# EAGLE board BME280_Sensor-Board_EAGLE (EAGLE 7.5.0)
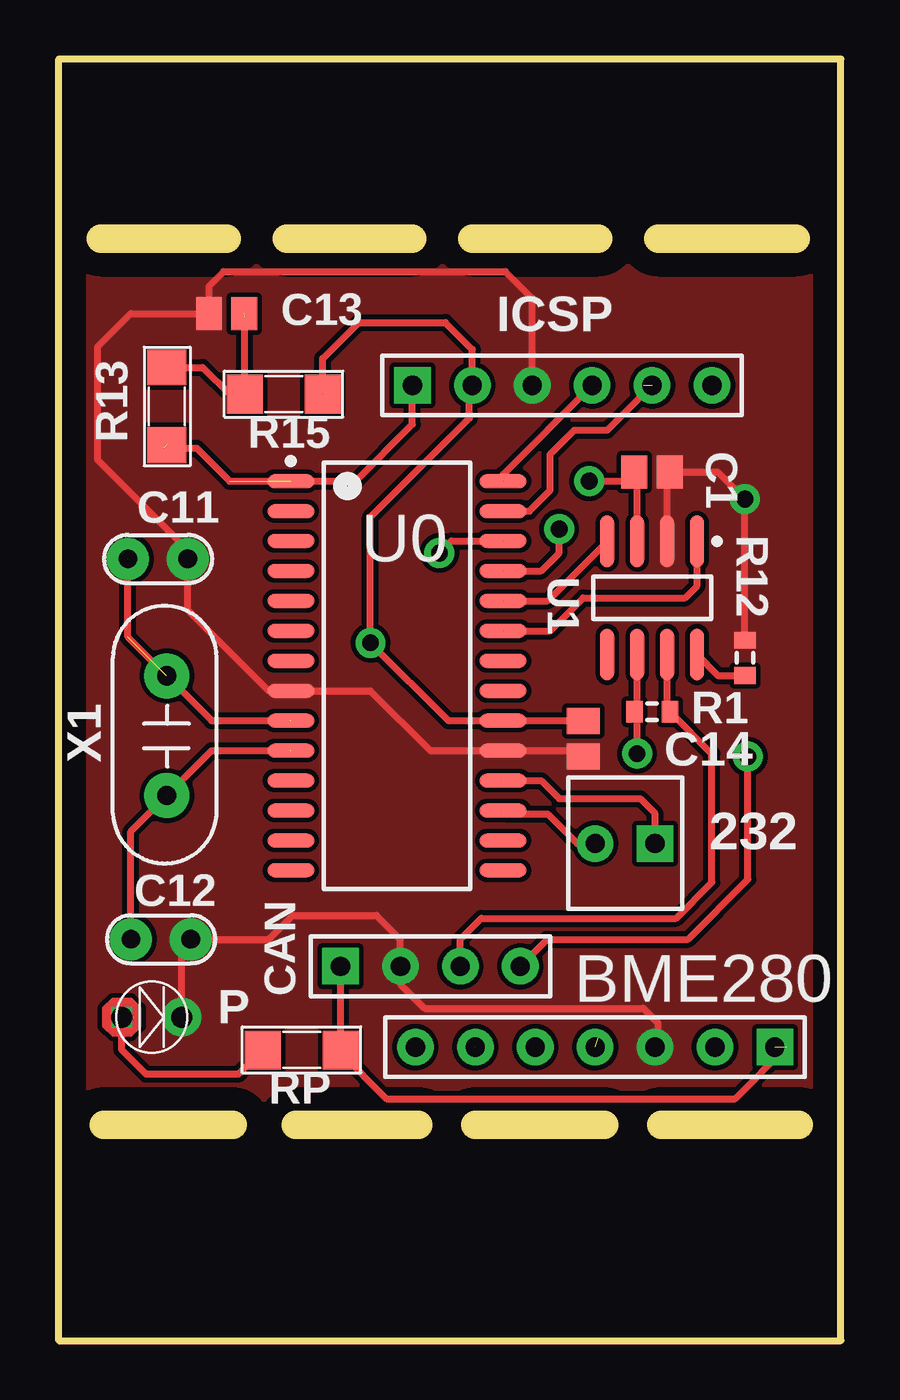
[diagram p0: board, top side]
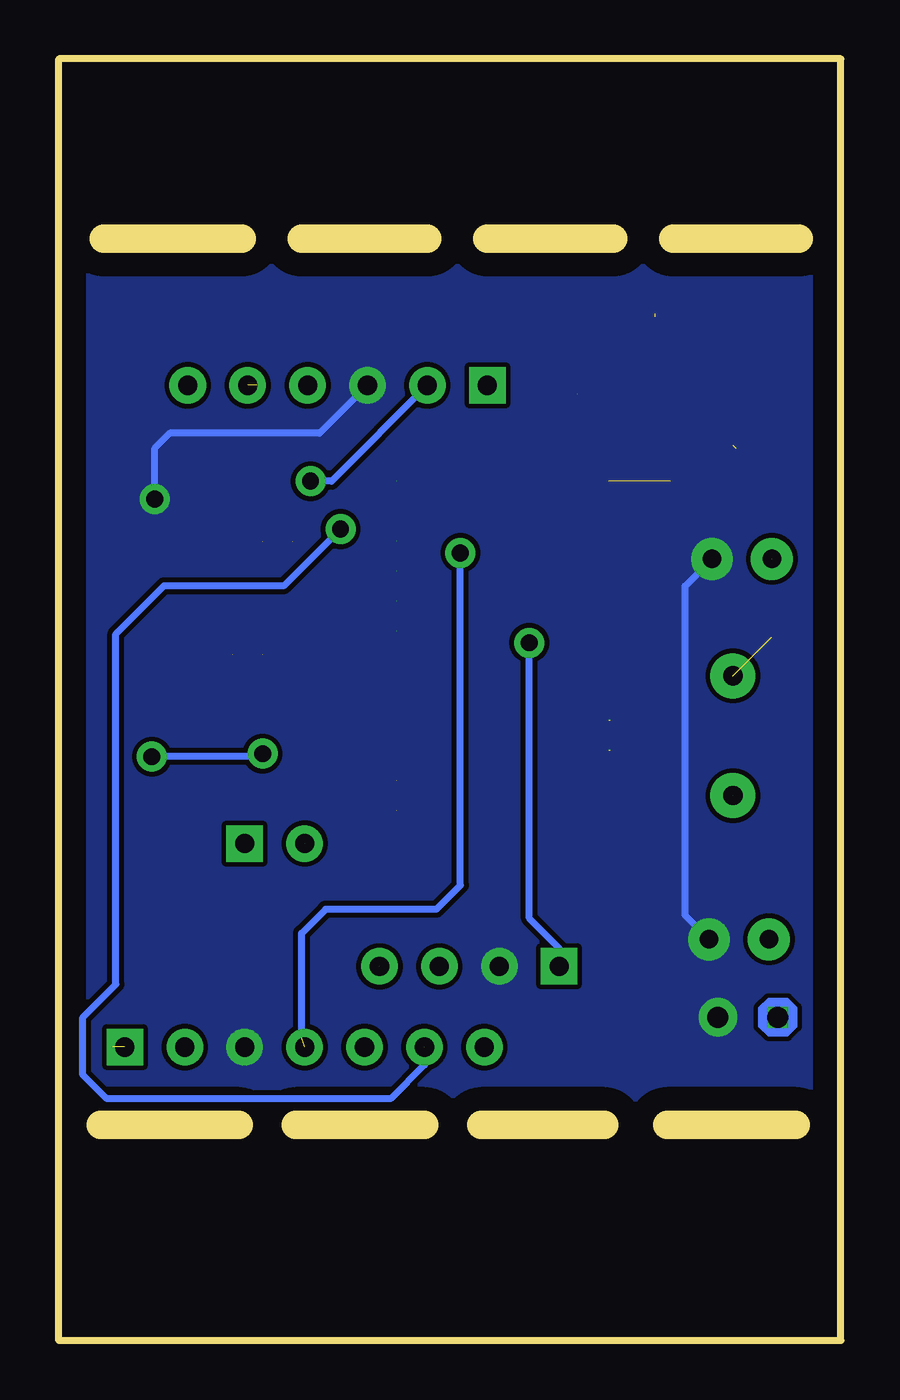
[diagram p1: board, bottom side, seen from below]

Size 33.15 x 54.36 mm. Coordinates in mm from the lower left corner, seen from the top.
Outline: 1.78,46.74 7.11,46.74
Outline: 9.65,46.74 14.99,46.74
Outline: 17.53,46.74 22.86,46.74
Outline: 25.53,9.14 31.37,9.14
Outline: 17.65,9.14 23.11,9.14
Outline: 10.03,9.14 15.24,9.14
Outline: 1.91,9.14 7.37,9.14
Outline: 25.4,46.74 31.24,46.74
Outline: 0,0 0,54.36 33.15,54.36 33.15,0 0,0
Copper layers (1*16): Top 0.035mm / dielectric 1.5mm / Bottom 0.035mm
Design rules "BME280_Sensor-Board_P_CAD": minimum track width 10mil, minimum drill 24mil, track to track 8mil, track to pad 8mil, pad to pad 8mil, via to via 8mil, smd to smd 8mil, copper to edge 40mil, drill to drill 8mil, minimum pad ring 0mil, minimum via ring 0mil, stop-mask expansion 4mil, vias tented up to drill 0mil, thermal gap 10mil

## Footprints (pad centres in the part's own frame; a part is rotated, then mirrored left to right if it is on the bottom)
HDR2_1PRIMARY = drill 0.813 pad 1.549 square: 1 0,0 | drill 0.813 pad 1.549: 2 2.54,0
HDR1X7_1PRIMARY = drill 0.813 pad 1.549 square: 1 0,0 | drill 0.813 pad 1.549: 2 2.54,0; 3 5.08,0; 4 7.62,0; 5 10.16,0; 6 12.7,0; 7 15.24,0
C0805_1PRIMARY = smd 1.1 x 1.4: 1 -0.75,0; 2 0.75,0
CN1_1PRIMARY = drill 0.787 pad 1.778: 1 -1.27,0; 2 1.27,0
HDR1X4_1PRIMARY = drill 0.813 pad 1.549 square: 1 0,0 | drill 0.813 pad 1.549: 2 2.54,0; 3 5.08,0; 4 7.62,0
HDR1X6_1PRIMARY = drill 0.813 pad 1.549 square: 1 0,0 | drill 0.813 pad 1.549: 2 2.54,0; 3 5.08,0; 4 7.62,0; 5 10.16,0; 6 12.7,0
LED-3MM-YELLOW_1PRIMARY = drill 0.889 pad 0.838 square: 1 0,0 | drill 0.889 pad 1.651: 2 2.54,0
J1-0603_1PRIMARY = smd 0.7 x 0.9: 1 -0.75,0; 2 0.75,0
SM-RES-1206_1PRIMARY = smd 1.524 x 1.651: 1 0,0; 2 3.302,0
SOIC-SO28_L_1PRIMARY = smd 2 x 0.6: 1 -4.5,8.255; 2 -4.5,6.985; 3 -4.5,5.715; 4 -4.5,4.445; 5 -4.5,3.175; 6 -4.5,1.905; 7 -4.5,0.635; 8 -4.5,-0.635; 9 -4.5,-1.905; 10 -4.5,-3.175; 11 -4.5,-4.445; 12 -4.5,-5.715; 13 -4.5,-6.985; 14 -4.5,-8.255; 15 4.5,-8.255; 16 4.5,-6.985; 17 4.5,-5.715; 18 4.5,-4.445; 19 4.5,-3.175; 20 4.5,-1.905; 21 4.5,-0.635; 22 4.5,0.635; 23 4.5,1.905; 24 4.5,3.175; 25 4.5,4.445; 26 4.5,5.715; 27 4.5,6.985; 28 4.5,8.255
SOIC-SN8_N_1PRIMARY = smd 2.2 x 0.6: 1 -2.4,1.905; 2 -2.4,0.635; 3 -2.4,-0.635; 4 -2.4,-1.905; 5 2.4,-1.905; 6 2.4,-0.635; 7 2.4,0.635; 8 2.4,1.905
XT2_1PRIMARY = drill 0.813 pad 1.905: 1 -2.54,0; 2 2.54,0

## Placement (x,y rotation side)
232  Header2  [HDR2_1PRIMARY]  25.27,21.08 180 top
BME280  Header_7  [HDR1X7_1PRIMARY]  30.35,12.45 180 top
C1  Cap_Pol3  [C0805_1PRIMARY]  25.15,36.83 0 top
C11  22pF  [CN1_1PRIMARY]  4.19,33.15 0 top
C12  22pF  [CN1_1PRIMARY]  4.32,17.02 0 top
C13  Cap_Pol3  [C0805_1PRIMARY]  7.11,43.56 180 top
C14  Cap_Pol3  [C0805_1PRIMARY]  22.22,25.53 270 top
CAN  Header_4  [HDR1X4_1PRIMARY]  11.94,15.88 0 top
ICSP  Header_6  [HDR1X6_1PRIMARY]  14.99,40.51 0 top
P  LED  [LED-3MM-YELLOW_1PRIMARY]  2.67,13.72 0 top
R1  Res3  [J1-0603_1PRIMARY]  25.15,26.67 0 top
R12  Res3  [J1-0603_1PRIMARY]  29.08,28.96 90 top
R13  470  [SM-RES-1206_1PRIMARY]  4.57,41.28 270 top
R15  10k  [SM-RES-1206_1PRIMARY]  7.87,40.13 0 top
RP  10k  [SM-RES-1206_1PRIMARY]  8.64,12.32 0 top
U0  PIC18F2480T-I/SO  [SOIC-SO28_L_1PRIMARY]  14.33,28.19 0 top
U1  MCP2551-E/SN  [SOIC-SN8_N_1PRIMARY]  25.15,31.5 270 top
X1  12Mhz  [XT2_1PRIMARY]  4.57,25.65 90 top

## Library data of the parts
232 BME280 C1 C11-C14 CAN ICSP P R1 R12 R13 R15 RP U0 U1 X1 = BME280_Sensor-Board_P_CAD

## Nets
GND1: BME280.3 C1.2 C11.2 C12.2 C13.2 C14.2 CAN.2 ICSP.3 P.2 R12.2 U0.8 U0.19 U1.2
NET232_1: 232.1 U0.18
NET232_2: 232.2 U0.17
NETBME280_4: BME280.4 U0.26
NETBME280_6: BME280.6 U0.25
NETC11_1: C11.1 U0.9 X1.2
NETC12_1: C12.1 U0.10 X1.1
NETC13_1: C13.1 R13.1 R15.1
NETCAN_3: CAN.3 R1.2 U1.7
NETCAN_4: CAN.4 R1.1 U1.6
NETICSP_1: ICSP.1 R13.2 U0.1
NETICSP_4: ICSP.4 U0.28
NETICSP_5: ICSP.5 U0.27
NETP_1: P.1 RP.1
NETR12_1: R12.1 U1.8
NETU0_23: U0.23 U1.1
NETU0_24: U0.24 U1.4
VCC1: BME280.1 C1.1 C14.1 CAN.1 ICSP.2 R15.2 RP.2 U0.20 U1.3

## Tracks (layer width: path | path; a pad name or v marks a point on that pad's centre or on a via)
GND1  (via drill 0.71 pad 1.27)
  Top 0.305: 5.59,14.1 P.2 5.21,16.64 C12.2 8.89,17.02 9.91,18.03 13.46,18.03 14.48,17.02 14.48,15.11 15.49,14.1 24.77,14.1 25.4,13.46 25.4,12.83 25.78,12.45 | 9.78,27.56 8.89,27.56 5.46,30.99 5.46,33.53 1.65,37.34 1.65,42.16 3.05,43.56 C13.2 6.36,44.72 6.99,45.34 18.92,45.34 20.07,44.2 ICSP.3 | U1.2 25.78,36.72 C1.2 27.94,36.83 v29.08,35.69 R12.2 | U0.8 13.21,27.56 15.75,25.02 21.98,25.02 C14.2
  Bottom 0.305: C11.2 6.6,32 6.6,18.03 C12.2 | ICSP.3 22.1,38.48 28.45,38.48 29.08,37.85 v29.08,35.69
  pour Top (no thermals): 0,54.36 33.15,54.36 33.15,0.25 32.89,0 0,0
  pour Bottom (no thermals): 0,54.36 33.15,54.36 33.15,0 0,0
NET232_1  (1 unrouted)
  Top 0.305: U0.18 20.45,23.75 21.21,22.99 24.64,22.99 25.27,22.35 232.1
NET232_2  (2 unrouted)
  Top 0.305: U0.17 18.98,22.33 20.73,22.33 21.97,21.08 232.2
NETBME280_4  (via drill 0.71 pad 1.27)  (2 unrouted)
  Top 0.305: v16.13,33.4 16.64,33.91 U0.26
  Bottom 0.305: v16.13,33.4 16.13,19.3 17.15,18.29 21.84,18.29 22.86,17.27 22.86,12.83 23.24,12.45
NETBME280_6  (via drill 0.71 pad 1.27)  (2 unrouted)
  Top 0.305: v21.21,34.42 21.21,33.4 20.45,32.64 U0.25
  Bottom 0.305: v21.21,34.42 23.62,32 28.7,32 30.73,29.97 30.73,15.11 32.13,13.72 32.13,11.27 31.12,10.25 19.09,10.25 17.65,11.68 BME280.6
NETC11_1  (3 unrouted)
  Top 0.305: 9.78,26.29 6.48,26.29 2.92,29.85 C11.1
NETC12_1  (2 unrouted)
  Top 0.305: 9.78,25.02 6.48,25.02 X1.1 3.05,21.59 C12.1
NETC13_1  (1 unrouted)
  Top 0.305: R13.1 6.1,41.28 7.24,40.13 R15.1 7.87,43.43
NETCAN_3  (1 unrouted)
  Top 0.305: U1.7 25.78,26.79 R1.2 27.69,24.88 27.69,19.43 26.16,17.91 17.91,17.91 17.02,17.02 CAN.3
NETCAN_4  (via drill 0.71 pad 1.27)  (2 unrouted)
  Top 0.305: U1.6 24.51,26.79 R1.1 24.51,26.56 v24.51,24.89 | CAN.4 20.7,17.02 26.67,17.02 29.21,19.56 v29.21,24.77
  Bottom 0.305: v29.21,24.77 24.64,24.77 v24.51,24.89
NETICSP_1  (2 unrouted)
  Top 0.305: 4.44,37.85 5.84,37.85 7.24,36.45 12.57,36.45 14.99,38.86 ICSP.1
NETICSP_4  (1 unrouted)
  Top 0.305: 19.3,36.45 U0.28 18.83,36.74 ICSP.4
  Bottom 0.305: ICSP.4 22.61,41.02
NETICSP_5  (2 unrouted)
  Top 0.305: 24.65,40.4 24.77,40.51 | ICSP.5 23.24,38.61 21.84,38.61 20.83,37.59 20.83,36.07 19.94,35.18 U0.27
NETP_1
  Top 0.305: P.1 2.67,12.32 3.68,11.3 7.62,11.3 RP.1
NETR12_1
  Top 0.305: U1.8 27.94,28.21 R12.1
NETU0_23  (1 unrouted)
  Top 0.305: U0.23 20.83,30.1 22.22,31.5 26.54,31.5 27.05,32 U1.1
NETU0_24  (2 unrouted)
  Top 0.305: U0.24 20.71,31.37 U1.4
VCC1  (via drill 0.71 pad 1.27)  (3 unrouted)
  Top 0.305: U1.3 24.51,36.72 C1.1 24.02,36.45 v22.48,36.45 | R15.2 11.18,41.66 12.7,43.18 16.38,43.18 17.53,42.04 ICSP.2 17.4,40.39 17.4,39.12 13.21,34.93 v13.21,29.59 16.51,26.29 U0.20 22.21,26.29 C14.1 | CAN.1 RP.2 11.94,12.19 13.88,10.25 28.67,10.25 30.86,12.45
  Bottom 0.305: v13.21,29.59 13.21,17.91 11.94,16.64 CAN.1 | ICSP.2 21.59,36.45 v22.48,36.45